# Altium PCB 433_RX.PcbDoc
Units mm, origin at the board's own origin, x right, y up, seen from the top; angles counter-clockwise.
Board outline 85.98 x 38.48 mm, 2 copper layers (Top Layer, Bottom Layer); 59 components, 23 nets, 144 pads, 3 vias.
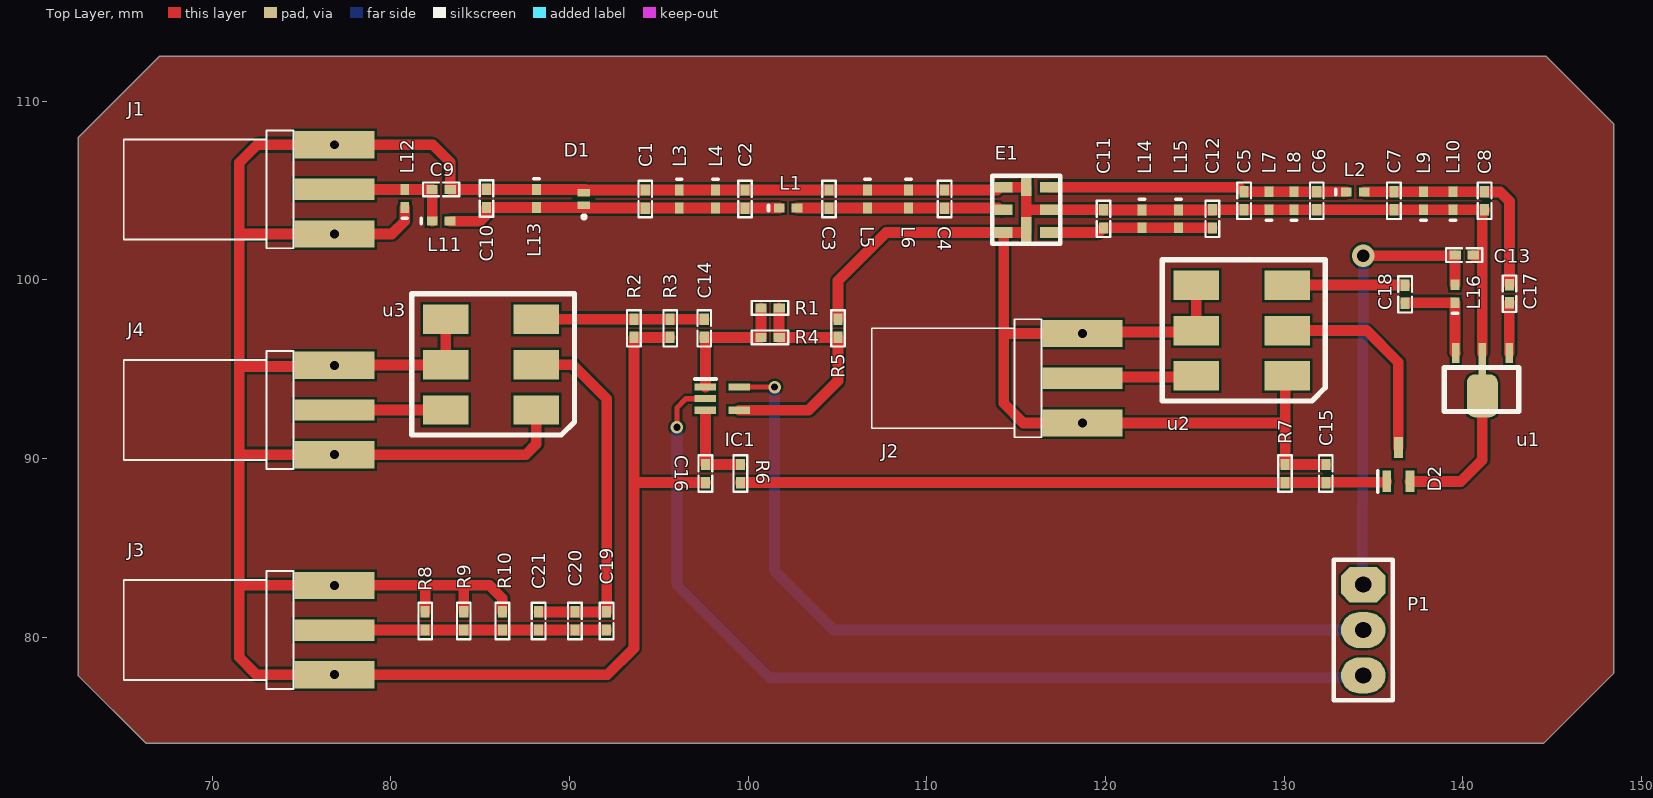
[diagram p0: Top Layer view]
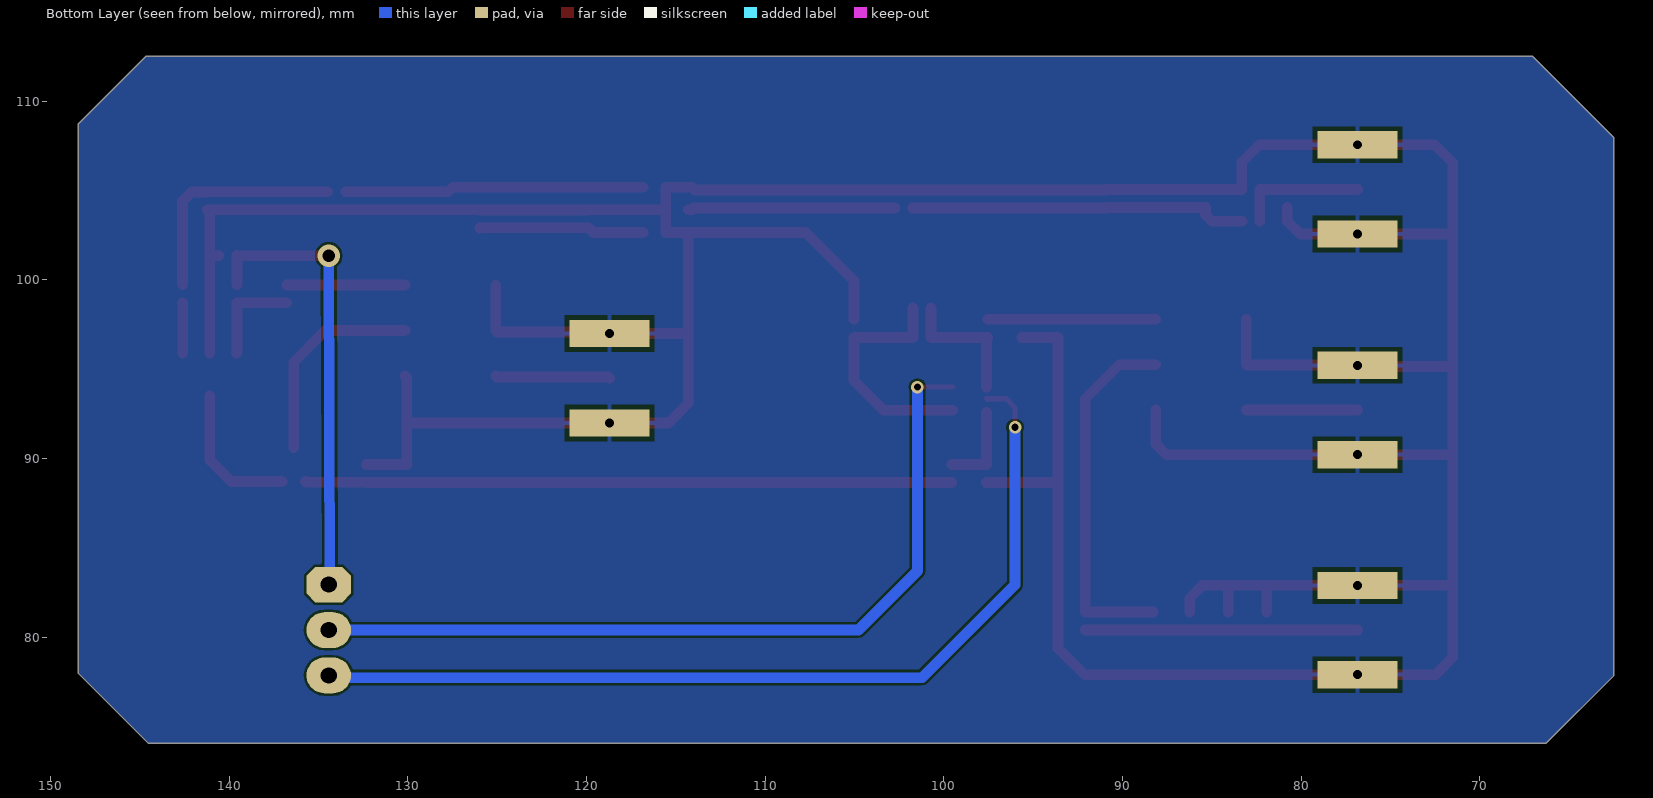
[diagram p1: Bottom Layer view, seen from below]

## Layer stack, top to bottom
Top Solder: solder mask 0.0102, Solder Resist, Dk 3.5
Top Layer: signal copper 0.0356
Dielectric 1: dielectric 0.32, FR-4, Dk 4.8
Bottom Layer: signal copper 0.0356
Bottom Solder: solder mask 0.0102, Solder Resist, Dk 3.5

## Board outline
66.294,74.041 62.484,77.851 62.484,107.95 67.056,112.522 144.653,112.522 148.463,108.712 148.463,77.978 144.526,74.041

## Design rules (kind name [scope] priority, off if disabled: settings)
Clearance [All] p1: gap=0.127 ignorepadtopadclearanceinfootprint=TRUE except(0: Arc-Hole Track-Hole SMDPad-Hole THPad-Hole Via-Hole Fill-Hole Poly-Hole Region-Hole Text-Hole)
HoleToHoleClearance [All] p1: gap=0.127 allowstackedmicrovias=TRUE
MinimumSolderMaskSliver [All] p1: minsoldermaskwidth=0.127
PolygonConnect [All] p1: connectstyle=Relief reliefconductorwidth=0.254 reliefentries=4 polygonreliefangle="90 Angle" airgapwidth=0.254
RoutingVias [All] p1: holewidth=0.711 width=1.27 viastyle="Through Hole" minholewidth=0.711 minwidth=1.27 maxholewidth=0.711 maxwidth=1.27
SilkToSilkClearance [All] p1: silktosilkclearance=0.127
SilkToSolderMaskClearance [IsPad] p1 off: minsilkscreentomaskgap=0.127 clearancetoexposedcopper=TRUE
SolderMaskExpansion [All] p1: expansion=0.102
Width [All] p1: maxlimit=5.254 minlimit=0.254 preferedwidth=0.6 minimp=50.000000 maximp=50.000000 favimp=50.000000
26 further rules are at their usual default settings.

## Components (designator, comment, footprint, x,y, rotation, side; value= is the part's Value field where it differs from the comment)
C1 "" C0402 94.234,104.521 r90 top
C2 "" C0402 99.822,104.521 r90 top
C3 "" C0402 104.521,104.521 r90 top
C4 "" C0402 110.998,104.521 r90 top
C5 "" C0402 127.762,104.425 r270 top
C6 "" C0402 131.826,104.425 r270 top
C7 "" C0402 136.144,104.425 r270 top
C8 "" C0402 141.224,104.425 r270 top
C9 "" C0402 82.804,105.06 r0 top
C10 "" C0402 85.344,104.552 r90 top
C11 "" C0402 119.888,103.409 r90 top
C12 "" C0402 125.984,103.409 r90 top
C13 "" C0402 140.081,101.378 r0 top
C14 "1P" C0402 97.536,97.282 r270 top
C15 "1nF" C0402 132.334,89.154 r90 top
C16 "1p" C0402 97.602,89.154 r90 top
C17 "" C0402 142.621,99.219 r270 top
C18 "" C0402 136.779,99.187 r90 top
C19 "" C0402 92.075,80.899 r270 top
C20 "" C0402 90.297,80.899 r270 top
C21 "" C0402 88.265,80.899 r270 top
D1 "PESD5V0X1BL" PESD5V0X1BL 90.805,104.521 r90 top
D2 "HSMS-2852-TR1G" SOT65P210X110-3N 136.398,89.662 r90 top
E1 "B3790" B3790 115.57,103.917 r90 top
IC1 "OPA810IDCKR" SOT65P210X110-5N 98.552,93.345 r0 top
J1 "Antenna" SMA-2 76.835,105.06 r0 top
J2 "LO" SMA-2 118.714,94.488 r0 top
J3 "OUTPUT" SMA-2 76.835,80.391 r0 top
J4 "LO_Delay" SMA-2 76.835,92.71 r0 top
L1 "56nH" 0402-A 102.235,104.013 r0 top
L2 "56nH" 0402-A 133.985,104.925 r0 top
L3 "" 0402-A 96.139,104.521 r270 top
L4 "" 0402-A 98.171,104.521 r270 top
L5 "" 0402-A 106.68,104.521 r270 top
L6 "" 0402-A 108.966,104.521 r270 top
L7 "" 0402-A 129.159,104.425 r90 top
L8 "" 0402-A 130.556,104.425 r90 top
L9 "" 0402-A 137.795,104.425 r90 top
L10 "" 0402-A 139.446,104.425 r90 top
L11 "56nH" 0402-A 82.804,103.282 r0 top
L12 "" 0402-A 80.772,104.552 r90 top
L13 "" 0402-A 88.138,104.552 r270 top
L14 "" 0402-A 122.047,103.409 r270 top
L15 "" 0402-A 124.079,103.409 r270 top
L16 "" 0402-A 139.573,99.219 r90 top
P1 "PIN3" PIN3 134.432,82.931 r270 top
R1 "50K_Trim" R0402 101.219,98.425 r0 top
R2 "100K" R0402 93.599,97.282 r90 top
R3 "100K_TRIM" R0402 95.631,97.282 r90 top
R4 "50K" R0402 101.219,96.774 r0 top
R5 "1K" R0402 105.029,97.282 r90 top
R6 "1K" R0402 99.56,89.154 r270 top
R7 "10K" R0402 130.048,89.154 r90 top
R8 "4.7K" R0402 81.915,80.899 r90 top
R9 "4.7K" R0402 84.074,80.899 r90 top
R10 "4.7K" R0402 86.233,80.899 r90 top
u1 "1" TOP3M9008 142.597,95.904 r180 top
u2 "Ade-6" Ade-6 130.167,94.615 r90 top
u3 "Ade-6" Ade-6 88.138,92.71 r90 top

## Footprints (in the part's own frame and the unit in brackets; to place one, negate y for a bottom-side part, rotate by r counter-clockwise, add the part's x,y. Pads: shape width x height; smd on the part's side, far side on the other; paste and mask are expansions set on the pad)
0402-A [mm] "Chip Inductor, Body 1.0x0.5mm, IPC High Density"
  rect 0.6x0.5 smd: 1(-0.5,0) 2(0.5,0)
  silkscreen extent -1.1,-0.15 -1.1,0.15, body extent -0.55,-0.3 0.55,0.3, height 0.55
Ade-6 [mm]
  rect 1.65x2.54 smd: 1(0,0) 2(2.54,0) 3(5.08,0) 4(5.08,5.08) 5(2.54,5.08) 6(0,5.08)
  silkscreen extent -1.4,-2.13 6.51,6.98
B3790 [mm]
  rect 0.6x1 smd: 1(-1.27,1.27) 2(0,1.27) 3(1.27,1.27) 5(1.27,-1.27) 6(0,-1.27) 7(-1.27,-1.27)
  rect 1x0.6 smd: 4(1.27,0)
  rect 1.5x0.6 smd paste+0: 8(-1.143,0)
  silkscreen extent -1.9,-1.9 1.9,1.9, body extent -1.9,-1.91 1.9,1.91, height 1.5
C0402 [mil] "C0402"
  rect 25x20 smd: 1(-20,0) 2(20,0)
  silkscreen extent -40,-15 40,15
PESD5V0X1BL [mm]
  rect 0.4x0.7 smd: 1(-0.35,0) 2(0.35,0)
  silkscreen extent -1.1,-0.1 -0.9,0.1
PIN3 [mm]
  oct 2x2.5 hole 0.9: 1(0,0)
  oval 2x2.5 hole 0.9: 2(2.54,0) 3(5.08,0)
  silkscreen extent -1.4,-1.65 6.48,1.65
R0402 [mil] "R0402"
  rect 25x20 smd: 1(-20,0) 2(20,0)
  silkscreen extent -40,-15 40,15
SMA-2 [mm]
  rect 4.5x1.2 smd: 1(0,0)
  rect 4.5x1.524 hole 0.5: 2(0,-2.5) 2(0,2.5)
  silkscreen extent -11.8,-3.3 -2.3,3.3
SOT65P210X110-3N [mm]
  rect 1.2x0.5 smd: 1(-0.95,0.65) 2(-0.95,-0.65) 3(0.95,0)
  silkscreen extent -1.55,1.15 -0.35,1.15, body extent -1.05,-1.01 1.05,1.01, height 1.1
SOT65P210X110-5N [mm]
  rect 1.2x0.4 smd: 1(-0.95,0.65) 2(-0.95,0) 3(-0.95,-0.65) 4(0.95,-0.65) 5(0.95,0.65)
  silkscreen extent -1.55,1.1 -0.35,1.1, body extent -1.05,-1 1.05,1, height 1.1
TOP3M9008 [mm]
  rect 0.42x1.1 smd: 1(0,0) 2(1.5,1.067) 2(1.5,0) 3(3,0)
  rrect50% 1.73x2.4 smd: 2(1.5,2.4)
  silkscreen extent -0.53,0.81 3.63,3.28

## Part data
C1 C2 C3 C4 C5 C6 C7 C8 C9 C10 C11 C12 C13 C14 C15 C16 C17 C18 C19 C20 C21: library part CAP_NP, "CAP CER 0.1UF 10V 10% X5R 0402"
D1: "Diode", Manufacturer_Name=NXP, Datasheet Link=https://datasheet.datasheetarchive.com/originals/distributors/Datasheets-NXP/DSANXP010006370.pdf, HEIGHT=0.5mm, Manufacturer_Part_Number=PESD5V0X1BL
D2: "Diode", Manufacturer_Name="Avago Technologies", Mouser Part Number=630-HSMS-2852-TR1G, Datasheet Link=https://componentsearchengine.com/Datasheets/2/HSMS-2852-TR1G.pdf, HEIGHT=1.1mm, Manufacturer_Part_Number=HSMS-2852-TR1G, Mouser Price/Stock=https://www.mouser.com/Search/Refine.aspx?Keyword=630-HSMS-2852-TR1G
IC1: "Integrated Circuit", Manufacturer_Name="Texas Instruments", Mouser Part Number=595-OPA810IDCKR, Datasheet Link=https://eu.mouser.com/ProductDetail/Texas-Instruments/OPA810IDCKR?qs=W%2FMpXkg%252BdQ4VmPwYW7coEA%3D%3D, HEIGHT=1.1mm, Manufacturer_Part_Number=OPA810IDCKR, Mouser Price/Stock=https://www.mouser.co.uk/ProductDetail/Texas-Instruments/OPA810IDCKR?qs=W%2FMpXkg%252BdQ4VmPwYW7coEA%3D%3D
J1 J2 J3 J4: library part SMA-2, "SMA-2"
L1 L2 L3 L4 L5 L6 L7 L8 L9 L10 L11 L12 L13 L14 L15 L16: library part Inductor, "Inductor", Code_IEC=1005, Code_JEITA=0402, LatestRevisionDate=29-May-2009, LatestRevisionNote="IPC-7351 Footprint Added.", PackageDescription="Chip Inductor", PackageReference=0402-A, Published=8-Jun-2000, Publisher="Altium Limited"
R1 R2 R3 R4 R5 R6 R7 R8 R9 R10: library part RES, "RES MF 1.0M 1/10W 5% 0402"
u1: library part TQP3M9008

## Via types
v1: diameter 0.7, hole 0.411, Top Layer to Bottom Layer, 2 vias
v2: diameter 1.27, hole 0.711, Top Layer to Bottom Layer, 1 vias

## Nets (pads, with @x,y where several pads share a name; then routed paths per layer and width w, separated by ;. In a path a pad name is that pad's centre, name@x,y a point inside that pad or via, vN(x,y) a via of type N, cw(c..) or ccw(c..) an arc to the next point about the centre after c; other vN are vias at no path point)
ANT_OUT: C1.1 C2.1 C10.1 D1.1 L1.1 L3.2 L4.2 L11.2 L13.2 | length 19
  Top Layer w0.6: L11.2 84.993,103.282 85.344,103.633 C10.1 85.352,104.052 L13.2 D1.1@90.874,104.052 ; D1.1@90.913,104.013 C1.1 94.242,104.021 L3.2 L4.2 99.814,104.021 C2.1 L1.1
ED_OUT: C15.1 D2.1 R6.2 R7.1 | length 36.2
  Top Layer w0.6: R6.2 R7.1 130.429,88.646 C15.1 132.352,88.664 135.7,88.664 D2.1
EX_L: C11.1 C12.1 E1.7 L14.2 L15.2 | length 9.3
  Top Layer w0.6: E1.7 119.606,102.647 119.86,102.901 C11.1 119.896,102.909 L14.2 L15.2 125.976,102.909 C12.1
GND: C1.2 C2.2 C3.2 C4.2 C5.2 C6.2 C7.2 C8.2 C9.2 C10.2 C11.2 C12.2 C13.2 C15.2 C16.1 D1.2 D2.2 E1.1 E1.3 E1.4 E1.6 E1.8 J1.2 J2.2 J3.2 J4.2 L3.1 L4.1 L5.1 L6.1 L7.1 L8.1 L9.1 L10.1 L12.1 L13.1 L14.1 L15.1 R2.1 R3.1 R5.2 R7.2 R8.2 R9.2 R10.2 u1.2 u2.1 u2.4 u2.5 u3.1 u3.4 u3.5 | length 287.7
  Top Layer w0.6: J4.2@76.773,95.148 71.501,95.148 ; J4.2@76.835,95.21 76.855,95.23 83.038,95.23 u3.5 u3.4 ; J1.2@76.835,102.56 71.501,102.56 ; J1.2@76.859,102.56 80.05,102.56 80.772,103.282 L12.1 ; R8.2 81.915,82.891 ; R9.2 84.074,82.891 ; R10.2 86.233,82.169 85.511,82.891 84.074,82.891 ; u3.1 88.138,90.805 87.543,90.21 76.835,90.21 71.501,90.21 ; D1.2@90.89,105.052 L13.1 85.352,105.052 C10.2 C9.2 83.312,106.584 82.336,107.56 76.835,107.56 72.508,107.56 71.501,106.553 71.501,102.56 ; D1.2@90.913,105.029 C1.2 94.242,105.021 L3.1 L4.1 99.814,105.021 C2.2 C3.2 104.529,105.021 L5.1 L6.1 110.99,105.021 C4.2 113.942,105.029 114.1,105.187 E1.3 E1.4 115.57,103.79 ; R3.1 R2.1 93.599,88.646 ; C16.1 93.599,88.646 ; R5.2 105.029,99.949 107.727,102.647 E1.1 ; u2.5@125.004,97.072 118.797,97.072 118.714,96.988 114.3,96.988 ; u2.5 u2.4 ; R7.2 R7.2@130.058,89.662 ; 130.048,91.988 118.714,91.988 115.395,91.988 114.3,93.083 114.3,96.988 ; u2.1 130.058,94.506 R7.2@130.058,89.662 ; C15.2 R7.2@130.058,89.662 ; D2.2 139.893,88.712 141.097,89.916 u1.2@141.097,93.504 ; C13.2 140.589,101.364 140.607,101.346 141.097,101.346 ; u1.2@141.097,95.904 141.097,101.346 ; C8.2@141.097,103.917 141.097,101.346 ; C8.2 141.216,103.925 L10.1 L9.1 136.152,103.925 C7.2 C6.2 131.818,103.925 L8.1 L7.1 127.77,103.925 C5.2 C12.2 125.976,103.909 L15.1 L14.1 119.896,103.909 C11.2 E1.6 115.697,103.917 115.57,103.79 ; 71.501,82.891 71.501,90.21 ; 71.501,82.891 71.501,78.867 72.477,77.891 76.835,77.891 92.115,77.891 93.599,79.375 93.599,88.646 ; 71.501,82.891 76.835,82.891 81.915,82.891 ; 71.501,90.21 71.501,95.148 ; 71.501,95.148 71.501,102.56 ; 81.915,82.891 84.074,82.891 ; 114.3,96.988 E1.1 ; E1.1 115.57,102.647 E1.8 115.57,103.79
IF_OUT: C14.1 R2.2 R3.2 u3.3 | length 9.4
  Top Layer w0.6: u3.3 R2.2 95.758,97.79 C14.1
IF_VSS+: IC1.5 P1.2 | length 46.6
  Top Layer w0.3: IC1.5 v1(101.473,93.995)
  Bottom Layer w0.6: v1(101.473,93.995) 101.473,83.693 104.775,80.391 P1.2
IF_VSS-: IC1.2 P1.3 | length 52.3
  Top Layer w0.3: v1(96.012,91.745) 96.012,92.837 96.52,93.345 IC1.2 IC1.2@97.556,93.299
  Bottom Layer w0.6: v1(96.012,91.745) 96.012,82.931 101.219,77.724 P1.3@134.432,77.724
Input: C3.1 C4.1 E1.2 L1.2 L5.2 L6.2 | length 11.6
  Top Layer w0.6: L1.2 C3.1 104.529,104.021 L5.2 L6.2 110.99,104.021 C4.1 114.004,104.013 114.1,103.917 E1.2
LNA_OUT: C18.2 u2.3 | length 6.6
  Top Layer w0.6: u2.3@130.167,99.711 C18.2@136.779,99.711
LO_Delay_OUT: C19.1 C20.1 C21.1 u3.2 | length 20.5
  Top Layer w0.6: u3.2 90.17,95.25 92.075,93.345 C19.1 C20.1 C21.1
LO_OUT: D2.3 u2.2 | length 11.7
  Top Layer w0.6: u2.2 134.62,97.155 136.398,95.377 D2.3
LP_OUT: C19.2 C20.2 C21.2 J3.1 R8.1 R9.1 R10.1 | length 15.2
  Top Layer w0.6: J3.1 R8.1 R9.1 R10.1 C21.2 C20.2 C19.2
NetC9_1: C9.1 J1.1 L11.1 L12.2 | length 7.3
  Top Layer w0.254: J1.1 J1.1@76.859,105.084
  Top Layer w0.6: J1.1 L12.2@80.772,105.06 ; L12.2 82.288,105.052 C9.1 82.304,105.052 L11.1
NetC14_2: C14.2 IC1.1 R1.1 R4.1 | length 7.6
  Top Layer w0.6: C14.2 R4.1 R1.1 ; IC1.1 C14.2@97.602,96.774
NetC16_2: C16.2 IC1.3 R6.1 | length 4.9
  Top Layer w0.6: IC1.3@97.602,92.591 C16.2 R6.1
NetC17_2: C17.2 u1.1 | length 2.8
  Top Layer w0.6: u1.1 142.609,95.916 142.609,98.699 C17.2
NetC18_1: C18.1 L16.1 u1.3 | length 5.6
  Top Layer w0.6: C18.1@136.779,98.719 L16.1 139.573,95.928 u1.3
NetIC1_4: IC1.4 R1.2 R4.2 R5.1 | length 13.6
  Top Layer w0.6: IC1.4 99.51,92.702 103.378,92.702 105.029,94.353 R5.1 R4.2 R1.2
NetJ2_1: J2.1 u2.6 | length 6.4
  Top Layer w0.6: J2.1 118.777,94.551 125.024,94.551 u2.6
NetJ4_1: J4.1 u3.6 | length 6.2
  Top Layer w0.6: J4.1 u3.6
Output: C5.1 C6.1 E1.5 L2.1 L7.2 L8.2 | length 16.8
  Top Layer w0.6: E1.5 127.48,105.187 127.734,104.933 C5.1 127.77,104.925 L7.2 L8.2 131.818,104.925 C6.1 131.834,104.925 L2.1
SAW_OUT: C7.1 C8.1 C17.1 L2.2 L9.2 L10.2 | length 13
  Top Layer w0.6: L2.2 136.136,104.925 C7.1 136.152,104.925 L9.2 L10.2 141.216,104.925 C8.1 141.242,104.916 142.099,104.916 142.621,104.394 C17.1
VDD_LNA: C13.1 L16.2 P1.1 | length 25.2
  Top Layer w0.6: v2(134.432,101.346) 134.435,101.349 C13.1@139.573,101.349 ; L16.2 C13.1@139.573,101.349 ; C13.1 C13.1@139.573,101.349
  Bottom Layer w0.6: P1.1@134.369,82.931 v2(134.432,101.346)

## Polygon pours and split planes (outlines as drawn)
no net on Top Layer (solid, pour order 24): 67.056,112.522 62.484,107.95 62.484,77.851 66.294,74.041 144.526,74.041 148.463,77.978 148.463,108.712 144.653,112.522
no net on Top Layer (solid, pour order 22): 67.056,112.903
GND on Top Layer (solid, pour order 10): 69.215,103.632
GND on Bottom Layer (solid, pour order 30): 65.405,112.776
GND on Bottom Layer (solid, pour order 28): 67.056,112.522 62.484,107.95 62.484,77.851 66.294,74.041 144.526,74.041 148.463,77.978 148.463,108.712 144.653,112.522
no net on Bottom Layer (solid, pour order 18): 66.802,112.903
GND on Bottom Layer (solid, pour order 14): 144.653,110.998

## Silkscreen, mask and mechanical layers (free items; w line width, h text height)
Drill Drawing:
  the board outline again, w0.254